# EAGLE board CT_schematic (EAGLE 7.6.0)

Size 100 x 80 mm. Coordinates in mm from the lower left corner, seen from the top.
Outline: 0,0 100,0 100,80 0,80 0,0
Copper layers (1*16): Top 0.035mm / dielectric 1.5mm / Bottom 0.035mm
Design rules "default": minimum track width 10mil, minimum drill 24mil, track to track 8mil, track to pad 8mil, pad to pad 8mil, via to via 8mil, smd to smd 8mil, copper to edge 40mil, drill to drill 8mil, minimum pad ring 10mil, minimum via ring 8mil, stop-mask expansion 4mil, vias tented up to drill 0mil, thermal gap 10mil

## Footprints (pad centres in the part's own frame; a part is rotated, then mirrored left to right if it is on the bottom)
C0603 = smd 0.8 x 0.8: 1 -0.762,0; 2 0.762,0
C0402 = smd 0.5 x 0.5: 1 -0.508,0; 2 0.508,0
C1210 = smd 1.2 x 2.5: 1 -1.524,0; 2 1.524,0
C0805 = smd 1.2 x 1.3: 1 -1.016,0; 2 1.016,0
EXV-9H = smd 3.505 x 1.676: 1 -2.857,0; 2 2.857,0
L0603 = smd 0.8 x 0.8: 1 -0.762,0; 2 0.762,0
PJ-037B_PACKAGE = drill 3.7 square: 1 12,0 | drill 3.2 square: 2 6,0
R0603 = smd 0.8 x 0.8: 1 -0.762,0; 2 0.762,0
TFBGA64 = smd 0.35 x 0.35: A1 -1.75,1.75; A2 -1.25,1.75; A3 -0.75,1.75; A4 -0.25,1.75; A5 0.25,1.75; A6 0.75,1.75; A7 1.25,1.75; A8 1.75,1.75; B1 -1.75,1.25; B2 -1.25,1.25; B3 -0.75,1.25; B4 -0.25,1.25; B5 0.25,1.25; B6 0.75,1.25; B7 1.25,1.25; B8 1.75,1.25; C1 -1.75,0.75; C2 -1.25,0.75; C3 -0.75,0.75; C4 -0.25,0.75; C5 0.25,0.75; C6 0.75,0.75; C7 1.25,0.75; C8 1.75,0.75; D1 -1.75,0.25; D2 -1.25,0.25; D3 -0.75,0.25; D4 -0.25,0.25; D5 0.25,0.25; D6 0.75,0.25; D7 1.25,0.25; D8 1.75,0.25; E1 -1.75,-0.25; E2 -1.25,-0.25; E3 -0.75,-0.25; E4 -0.25,-0.25; E5 0.25,-0.25; E6 0.75,-0.25; E7 1.25,-0.25; E8 1.75,-0.25; F1 -1.75,-0.75; F2 -1.25,-0.75; F3 -0.75,-0.75; F4 -0.25,-0.75; F5 0.25,-0.75; F6 0.75,-0.75; F7 1.25,-0.75; F8 1.75,-0.75; G1 -1.75,-1.25; G2 -1.25,-1.25; G3 -0.75,-1.25; G4 -0.25,-1.25; G5 0.25,-1.25; G6 0.75,-1.25; G7 1.25,-1.25; G8 1.75,-1.25; H1 -1.75,-1.75; H2 -1.25,-1.75; H3 -0.75,-1.75; H4 -0.25,-1.75; H5 0.25,-1.75; H6 0.75,-1.75; H7 1.25,-1.75; H8 1.75,-1.75
QFN-28 = smd 0.813 x 0.305: 1 -2.451,1.5; 2 -2.451,1; 3 -2.451,0.5; 4 -2.451,0; 5 -2.451,-0.5; 6 -2.451,-1; 7 -2.451,-1.5; 15 2.451,-1.5; 16 2.451,-1; 17 2.451,-0.5; 18 2.451,0; 19 2.451,0.5; 20 2.451,1; 21 2.451,1.5 | smd 0.305 x 0.813: 8 -1.5,-2.451; 9 -1,-2.451; 10 -0.5,-2.451; 11 0,-2.451; 12 0.5,-2.451; 13 1,-2.451; 14 1.5,-2.451; 22 1.5,2.451; 23 1,2.451; 24 0.5,2.451; 25 0,2.451; 26 -0.5,2.451; 27 -1,2.451; 28 -1.5,2.451 | smd 3.607 x 3.607: 29 0,0
SJ-43515TS-SMT-TR = smd 2.2 x 3: 1 0.6,-7.4; 4 3.4,-7.4 | smd 3 x 3: 2 12.8,-7.4; 5 17,-3 | smd 2 x 3: 3 5.3,0; 6 2.5,0 | drill 1.8: P$7 4.5,-3.69; P$8 11.54,-3.69
ABS07-32.768KHZ-7-T = smd 1.1 x 2.4: 1 -2.5,0; 2 0,0
ABLS-25.000MHZ-B2F-T = smd 5.6 x 2.8: 1 -3.81,0; 2 5.69,0
ABLS-12.288MHZ-B4-T = smd 5.6 x 2.8: 1 -3.81,0; 2 5.69,0
SOIC-8_EP = smd 1.6 x 0.533: 1 -2.921,1.905; 2 -2.921,0.635; 3 -2.921,-0.635; 4 -2.921,-1.905; 5 2.921,-1.905; 6 2.921,-0.635; 7 2.921,0.635; 8 2.921,1.905 | smd 2.54 x 3.302: EPAD 0,0 | drill 0.406 pad 0.406: P$1 -0.508,0.635; P$2 0.381,0.635; P$3 -0.508,-0.635; P$4 0.381,-0.635
SON-6 = smd 0.55 x 0.3: 1 -0.355,0.5 | smd 0.52 x 0.3: 2 -0.37,0; 3 -0.37,-0.5; 4 0.37,-0.5; 5 0.37,0; 6 0.37,0.5
SW_4-1437565-2 = smd 1.4 x 2.1: 1 -2.23,4.55; 2 -2.23,-4.55; 3 2.23,4.55; 4 2.23,-4.55
LGM67K-G1J2-24-Z = smd 0.8 x 1.4: A -2,0; C 0,0
NC7SZ125M5X = smd 1.3 x 0.7: 1 -1.3,0.95; 2 -1.3,0; 3 -1.3,-0.95; 4 1.3,-0.95; 5 1.3,0.95
DUMMY_PACKAGE_132 = drill 0.3: 1 0,-1; 2 1.5,-1

## Placement (x,y rotation side)
C1  1e-07  [C0603]  -58.42,59.69 0 top  (outside the outline)
C2  1e-07  [C0603]  -62.23,59.69 0 top  (outside the outline)
C3  1e-07  [C0603]  -66.04,59.69 0 top  (outside the outline)
C4  1e-07  [C0603]  -15.24,64.77 0 top  (outside the outline)
C5  4.7e-06  [C0603]  -54.61,59.69 0 top  (outside the outline)
C6  1e-08  [C0603]  -19.05,64.77 0 top  (outside the outline)
C7  1e-06  [C0603]  -22.86,64.77 0 top  (outside the outline)
C8  1e-07  [C0603]  -26.67,64.77 0 top  (outside the outline)
C9  1e-11  [C0402]  -62.23,64.77 0 top  (outside the outline)
C10  1e-11  [C0402]  -66.04,64.77 0 top  (outside the outline)
C11  1e-11  [C0402]  -69.85,64.77 0 top  (outside the outline)
C12  1e-11  [C0402]  -15.24,69.85 0 top  (outside the outline)
C13  2.2e-05  [C1210]  -38.1,46.99 0 top  (outside the outline)
C14  2.2e-05  [C1210]  -44.45,46.99 0 top  (outside the outline)
C15  1e-09  [C0402]  -19.05,69.85 0 top  (outside the outline)
C16  1e-09  [C0402]  -22.86,69.85 0 top  (outside the outline)
C17  1e-07  [C0402]  -26.67,69.85 0 top  (outside the outline)
C18  1e-07  [C0402]  -30.48,69.85 0 top  (outside the outline)
C19  1e-07  [C0402]  -34.29,69.85 0 top  (outside the outline)
C20  1e-07  [C0402]  -38.1,69.85 0 top  (outside the outline)
C21  1e-07  [C0402]  -41.91,69.85 0 top  (outside the outline)
C22  1e-05  [C0805]  -27.94,54.61 0 top  (outside the outline)
C23  1e-05  [C0805]  -33.02,54.61 0 top  (outside the outline)
C24  1e-05  [C0805]  -38.1,54.61 0 top  (outside the outline)
C25  1e-05  [C0805]  -43.18,54.61 0 top  (outside the outline)
C26  1e-05  [C0805]  -48.26,54.61 0 top  (outside the outline)
C27  2.2e-11  [C0402]  -54.61,64.77 0 top  (outside the outline)
C28  2.2e-11  [C0402]  -58.42,64.77 0 top  (outside the outline)
C29  1e-05  [C1210]  -50.8,46.99 0 top  (outside the outline)
C30  1e-05  [C1210]  -57.15,46.99 0 top  (outside the outline)
C31  1e-05  [C1210]  -63.5,46.99 0 top  (outside the outline)
C32  1e-05  [C1210]  -16.51,54.61 0 top  (outside the outline)
C33  1e-07  [C0402]  -45.72,69.85 0 top  (outside the outline)
C34  0.0001  [EXV-9H]  -17.78,33.02 0 top  (outside the outline)
C35  0.0001  [EXV-9H]  -29.21,33.02 0 top  (outside the outline)
C36  1e-08  [C0402]  -49.53,69.85 0 top  (outside the outline)
F1  240.0  [L0603]  -30.48,64.77 0 top  (outside the outline)
J1  PJ-037B  [PJ-037B_PACKAGE]  -27.94,21.59 0 top  (outside the outline)
R1  10000.0  [R0603]  -15.24,59.69 0 top  (outside the outline)
R2  1000.0  [R0603]  -34.29,64.77 0 top  (outside the outline)
R3  910.0  [R0603]  -38.1,64.77 0 top  (outside the outline)
R4  4700.0  [R0603]  -41.91,64.77 0 top  (outside the outline)
R5  10000.0  [R0603]  -20.32,59.69 0 top  (outside the outline)
R6  47000.0  [R0603]  -25.4,59.69 0 top  (outside the outline)
R7  47000.0  [R0603]  -30.48,59.69 0 top  (outside the outline)
R8  47000.0  [R0603]  -35.56,59.69 0 top  (outside the outline)
R9  680.0  [R0603]  -45.72,64.77 0 top  (outside the outline)
R10  1402.2764227642  [R0603]  -57.15,54.61 0 top  (outside the outline)
R11  2200.0  [R0603]  -49.53,64.77 0 top  (outside the outline)
R12  10000.0  [R0603]  -40.64,59.69 0 top  (outside the outline)
R13  10000.0  [R0603]  -45.72,59.69 0 top  (outside the outline)
R14  82000.0  [R0603]  -50.8,59.69 0 top  (outside the outline)
R15  300000.0  [R0603]  -62.23,54.61 0 top  (outside the outline)
R16  120000.0  [R0603]  -67.31,54.61 0 top  (outside the outline)
U1  STM32L052R6H6  [TFBGA64]  -60.96,20.32 0 top  (outside the outline)
U2  WM8731CLSEFL  [QFN-28]  -30.48,48.26 0 top  (outside the outline)
U3  SJ-43515TS-SMT-TR  [SJ-43515TS-SMT-TR]  -39.37,10.16 0 top  (outside the outline)
U4  SJ-43515TS-SMT-TR  [SJ-43515TS-SMT-TR]  -67.31,10.16 0 top  (outside the outline)
U5  ABS07-32.768KHZ-7-T  [ABS07-32.768KHZ-7-T]  -48.26,40.64 0 top  (outside the outline)
U6  ABLS-25.000MHZ-B2F-T  [ABLS-25.000MHZ-B2F-T]  -48.26,33.02 0 top  (outside the outline)
U7  ABLS-12.288MHZ-B4-T  [ABLS-12.288MHZ-B4-T]  -25.4,40.64 0 top  (outside the outline)
U8  MIC5234YME  [SOIC-8_EP]  -57.15,39.37 0 top  (outside the outline)
U9  TPS3895ADRYR  [SON-6]  -57.15,68.58 0 top  (outside the outline)
U10  4-1437565-2  [SW_4-1437565-2]  -44.45,21.59 0 top  (outside the outline)
U11  Q65110A2395  [LGM67K-G1J2-24-Z]  -17.78,48.26 0 top  (outside the outline)
U12  nc7sz125m5x  [NC7SZ125M5X]  -21.59,53.34 0 top  (outside the outline)
U13  Dummy  [DUMMY_PACKAGE_132]  -54.61,69.85 0 top  (outside the outline)

## Library data of the parts
C1-C36 F1 J1 R1-R16 U1-U13 = circuit_tree

## Nets
CLK_CRYSTAL_U1_A1: C9.1 U1.A1 U5.1
CLK_CRYSTAL_U1_B1: C10.1 U1.B1 U5.2
CLK_CRYSTAL_U1_C1: C11.1 U1.C1 U6.1
CLK_CRYSTAL_U1_D1: C12.1 U1.D1 U6.2
CLK_CRYSTAL_U2_1: C27.1 U2.1 U7.1
CLK_CRYSTAL_U2_2: C28.1 U2.2 U7.2
GND: C1.2 C2.2 C3.2 C4.2 C5.2 C6.2 C7.2 C8.2 C9.2 C10.2 C11.2 C12.2 C16.2 C17.2 C18.2 C19.2 C20.2 C21.2 C22.2 C23.2 C24.2 C25.2 C26.2 C27.2 C28.2 C29.2 C30.2 C31.2 C32.2 C33.2 C34.2 C35.2 C36.2 J1.2 R2.2 R5.2 R6.2 R7.2 R8.2 R11.2 R14.2 R16.2 U1.C2 U1.D4 U1.D5 U1.D6 U1.F1 U2.4 U2.15 U2.19 U2.25 U2.26 U2.29 U3.1 U4.1 U8.7 U8.EPAD U9.2 U11.C U12.1 U12.3 U13.1
NET_U1_B4: R5.1 U1.B4
NET_U1_E1: R4.1 U1.E1 U12.4
NET_U1_H1: C6.1 C7.1 F1.1 U1.G1 U1.H1
NET_U1_H7: R3.1 U1.H7 U11.A
NET_U1_H8: R1.1 U1.H8 U10.3 U10.4
NET_U2_9: U2.9
NET_U2_20: C21.1 C26.1 U2.20
NET_U3_2: C14.1 R7.1 U3.2
NET_U3_5: C13.1 R6.1 U3.5
NET_U3_13: C13.2
NET_U3_14: C14.2
NET_U4_5: C15.1 C16.1 R8.1 R9.1 U4.5
NET_U4_21: R9.2
NET_U4_22: C15.2
NET_U8_4: R10.2 R11.1 U8.4
NET_U9_1: R13.1 R14.1 U9.1
NET_U9_3: R15.2 R16.1 U9.3
NET_U9_4: R12.1 U9.4 U12.2
NET_U10_1: R2.1 U10.1 U10.2
PROC_DAC_OUT1: U1.H3 U13.2
PROC_I2S2_CK: U1.G8 U2.7
PROC_I2S2_SD: U1.F7 U2.8
PROC_I2S2_WS: U1.A3 U2.9 U2.11
VCC_S1_11V3: C29.1 C30.1 C34.1 C35.1 J1.1 U8.5 U8.8
VCC_TIER1_1V8: C1.1 C2.1 C3.1 C4.1 C5.1 C8.1 C17.1 C18.1 C19.1 C20.1 C22.1 C23.1 C24.1 C25.1 C31.1 C32.1 C33.1 C36.1 F1.2 R1.2 R3.2 R4.2 R10.1 R12.2 R13.2 R15.1 U1.B2 U1.D2 U1.E4 U1.E5 U1.E6 U2.3 U2.5 U2.12 U2.18 U8.1 U9.6 U12.5

## Tracks (layer width: path | path; a pad name or v marks a point on that pad's centre or on a via)
CLK_CRYSTAL_U1_A1  (2 unrouted)
CLK_CRYSTAL_U1_B1  (2 unrouted)
CLK_CRYSTAL_U1_C1  (2 unrouted)
CLK_CRYSTAL_U1_D1  (2 unrouted)
CLK_CRYSTAL_U2_1  (2 unrouted)
CLK_CRYSTAL_U2_2  (2 unrouted)
GND  (61 unrouted)
NET_U1_B4  (1 unrouted)
NET_U1_E1  (2 unrouted)
NET_U1_H1  (4 unrouted)
NET_U1_H7  (2 unrouted)
NET_U1_H8  (3 unrouted)
NET_U2_20  (2 unrouted)
NET_U3_2  (2 unrouted)
NET_U3_5  (2 unrouted)
NET_U4_5  (4 unrouted)
NET_U8_4  (2 unrouted)
NET_U9_1  (2 unrouted)
NET_U9_3  (2 unrouted)
NET_U9_4  (2 unrouted)
NET_U10_1  (2 unrouted)
PROC_DAC_OUT1  (1 unrouted)
PROC_I2S2_CK  (1 unrouted)
PROC_I2S2_SD  (1 unrouted)
PROC_I2S2_WS  (2 unrouted)
VCC_S1_11V3  (6 unrouted)
VCC_TIER1_1V8  (37 unrouted)